# Altium PCB ebit_ad.PcbDoc (part 4 of 6)
Units mil, origin at the board's own origin, x right, y up, seen from the top; angles counter-clockwise.
Board outline 3958.82 x 3829.88 mil, 4 copper layers (Top Layer, MidLayer1, MidLayer2, Bottom Layer); 565 components, 392 nets, 1912 pads, 1242 vias.
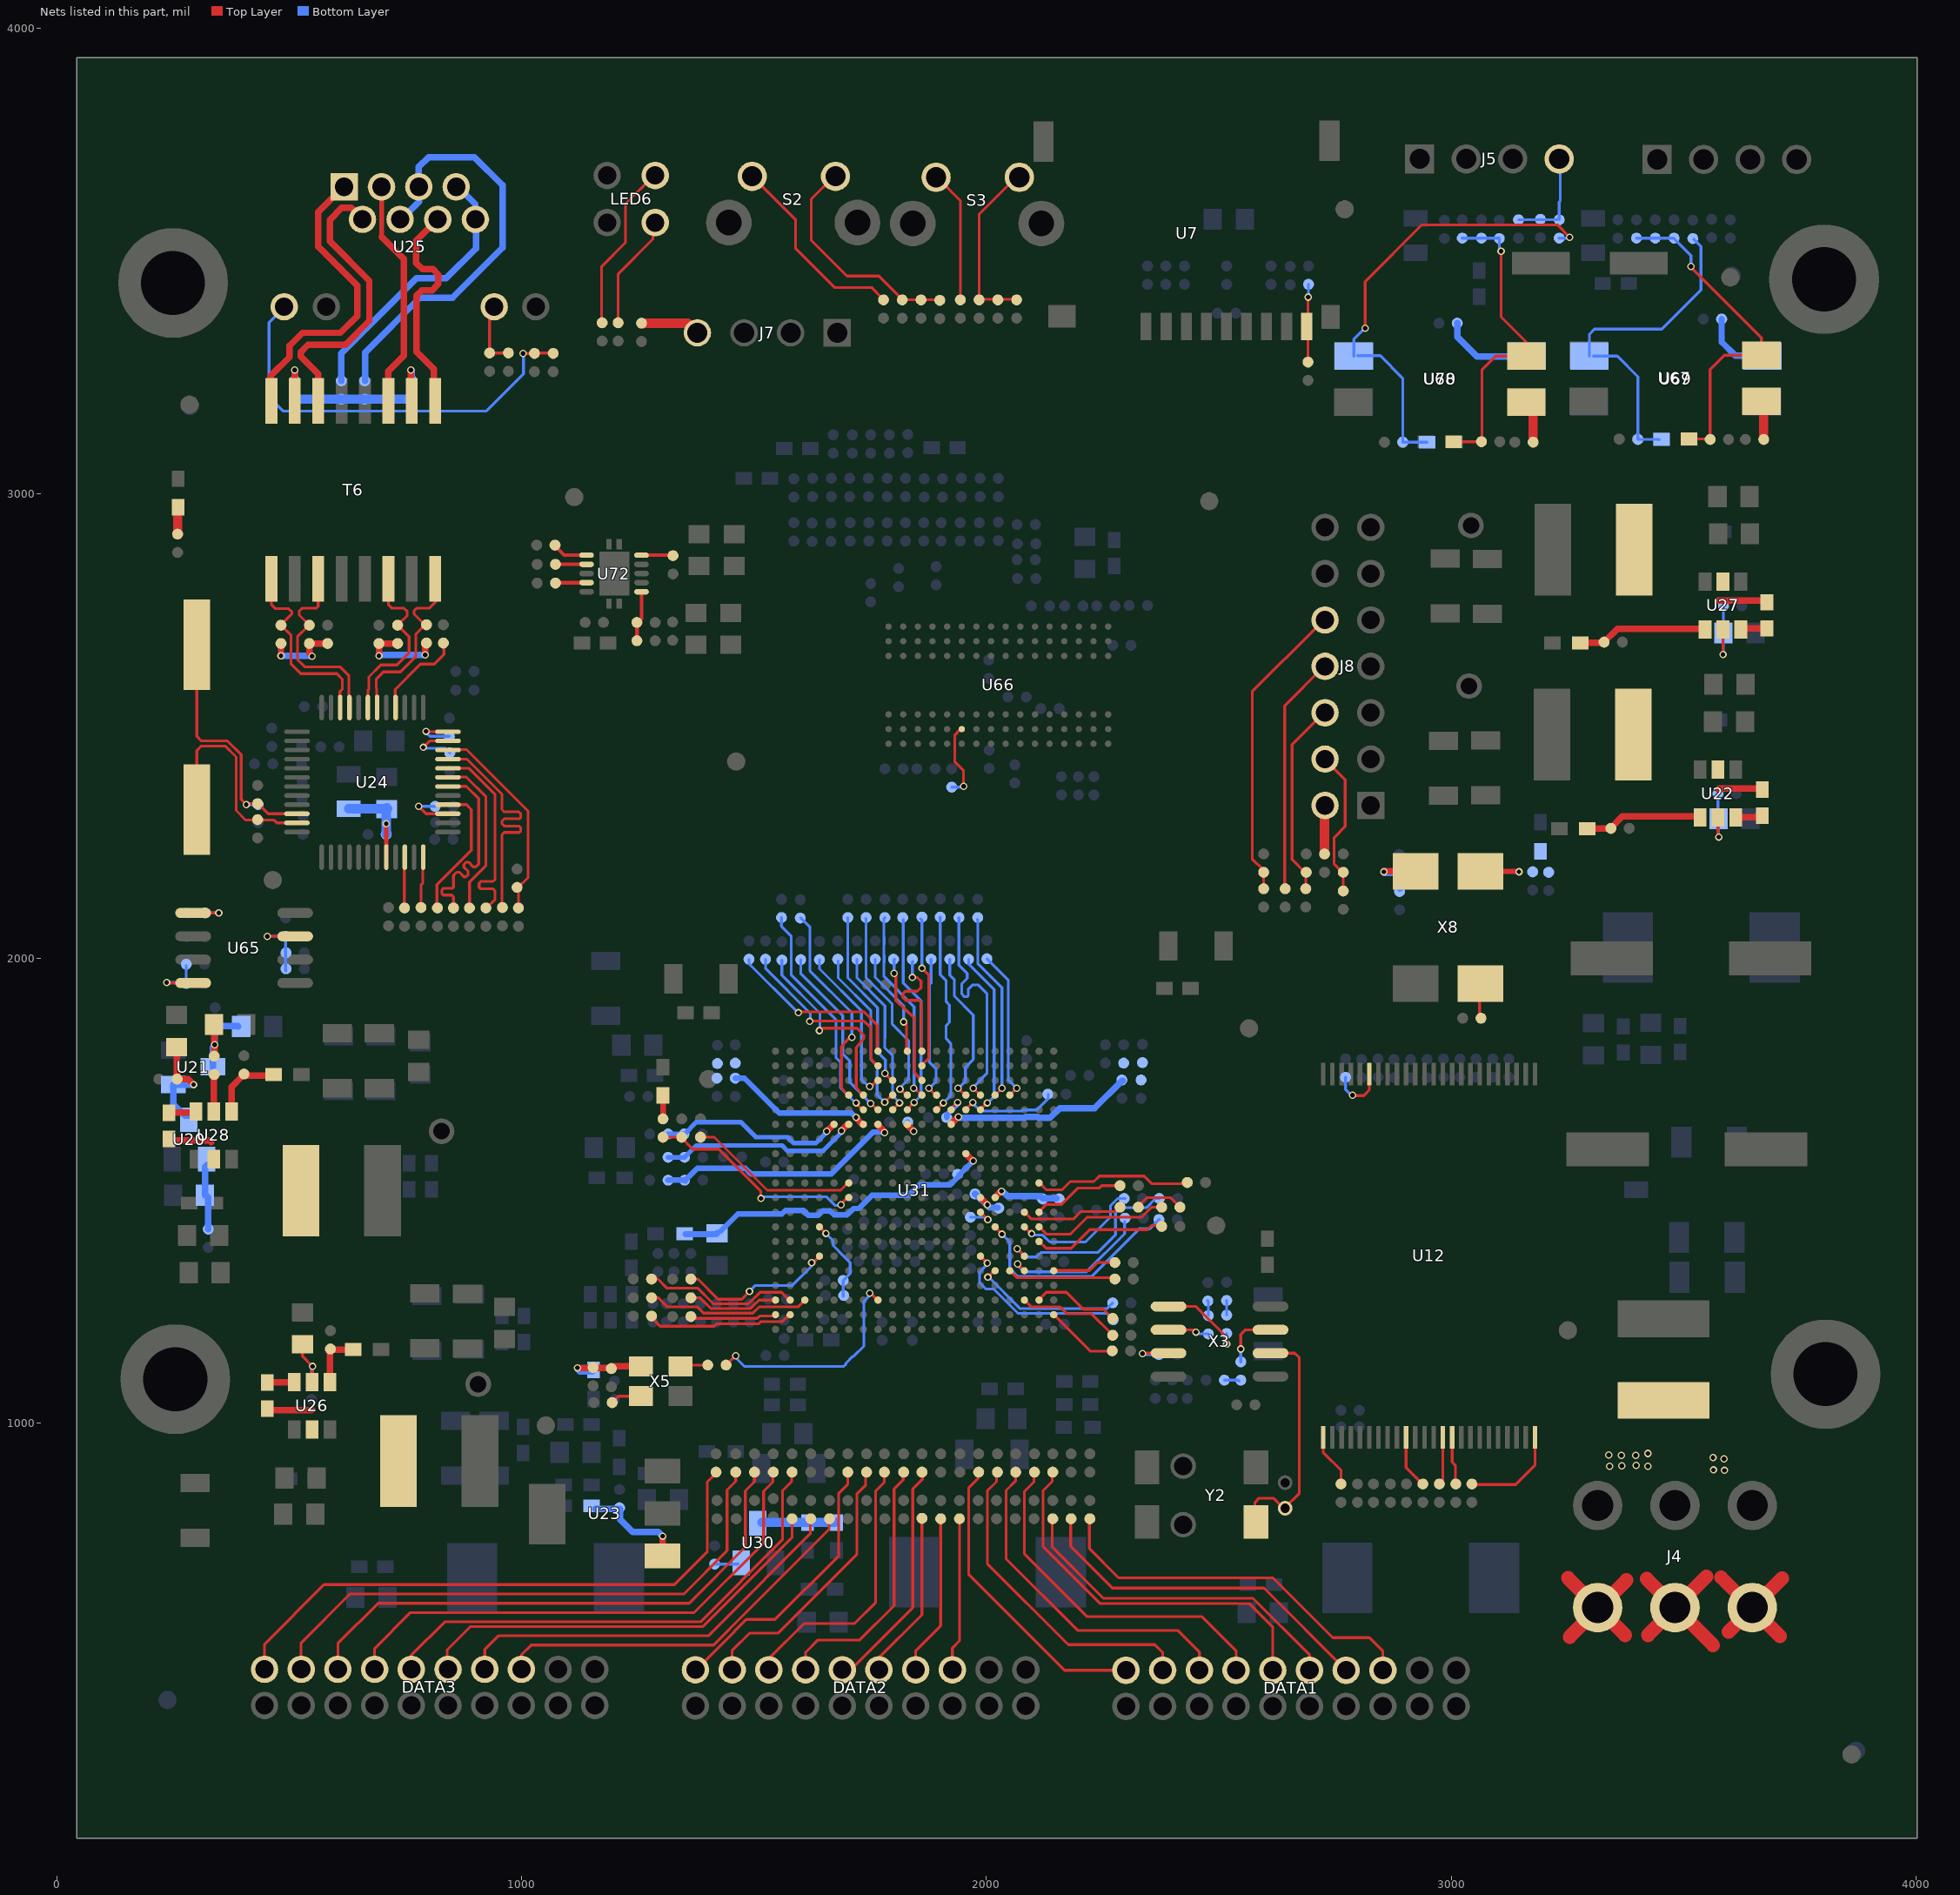
[diagram p6: the nets of this part, all layers, seen from the top]

## Via types
v1: diameter 16, hole 10, Top Layer to Bottom Layer, 1242 vias

## Nets (pads, with @x,y where several pads share a name; then routed paths per layer and width w, separated by ;. In a path a pad name is that pad's centre, name@x,y a point inside that pad or via, vN(x,y) a via of type N, cw(c..) or ccw(c..) an arc to the next point about the centre after c; other vN are vias at no path point) (continued)
NetJ5_4: C333.2 J5.4 R1363.2 R1364.2 | length 205.8
  Bottom Layer w6: C333.2@3144.69,3588.58 3226.38,3588.58 R1363.2@3227.36,3589.57 ; R1363.2@3232.28,3588.58 3232.28,3626.97 3234.25,3628.94 3234.25,3707.68 J5.4@3236.22,3709.65
NetJ7_4: J7.4 R1379.2 | length 126.1
  Top Layer w20: R1379.2@1260.83,3365.16 1261.81,3366.14 1357.28,3366.14 J7.4@1377.95,3345.47
NetL37_1: J4.1 J4.3 J4.5 L37.1 | length 1067.3
  Top Layer w30: 3251.14,667.15 3374.14,544.15 ; 3255.07,540.22 3377.09,662.23 ; 3420.38,665.18 3563.06,522.5 ; 3423.34,544.15 3549.29,670.1 ; 3580.78,668.14 3706.73,542.18 ; 3596.52,551.04 3711.65,666.17
  other v1: 3587.66,898.39 3564.05,899.38 3340.68,907.25 3423.34,907.25 3367.25,908.23 3397.75,909.22 3586.68,922.99 3563.06,925.94 3366.26,930.86 3396.77,930.86 3338.71,931.85 3423.34,934.8
NetLED1_1: LED1.1 R1501.2 | length 50.6
  Top Layer w12: R1501.2@1303.15,1654.53 1304.13,1655.51 LED1.1@1304.13,1704.72
NetLED4_1: LED4.1 R47.2 | length 55.1
  Top Layer w20: R47.2@259.84,2912.4 LED4.1@259.84,2967.52
NetLED6_1: LED6.1 R46.2 | length 238.7
  Top Layer w6: R46.2@1207.68,3367.13 1207.68,3472.44 1282.48,3547.24 LED6.1@1282.48,3574.8
NetLED6_2: LED6.2 R45.2 | length 369.7
  Top Layer w6: R45.2@1173.23,3364.17 1172.24,3365.16 1172.24,3488.19 1223.43,3539.37 1223.43,3623.03 1284.45,3684.05 LED6.2@1287.4,3684.05
NetR37_2: J8.6 R37.2 R1507.1 | length 411.3
  Top Layer w6: R37.2@2687.01,2149.61 2687.01,2183.07 2657.48,2212.6 2657.48,2459.65 2715.55,2517.72 J8.6@2722.44,2517.72
NetR117_1: R117.1 R2440.1 | length 32.3
  Bottom Layer w6: R2440.1@2511.81,1092.52 2541.34,1092.52 R117.1@2543.31,1090.55
NetR117_2: R117.2 X3.3 | length 128.1
  Top Layer w6: v1(2547.24,1159.45) 2547.24,1190.94 2557.09,1200.79 X3.3@2611.22,1200.79
  Bottom Layer w6: R117.2@2547.24,1131.89 v1@2547.24,1160.43
NetR120_2: R120.2 R2438.1 | length 33.3
  Bottom Layer w6: R2438.1@2475.39,1263.78 2477.36,1261.81 R120.2@2477.36,1231.3
NetR122_2: R122.2 R2439.1 | length 31.5
  Bottom Layer w6: R122.2@2516.73,1232.28 R2439.1@2516.73,1263.78
NetR1345_1: R1344.1 R1345.1 R1348.1 R2544.1 R2552.2 U67.2 | length 701.2
  Top Layer w6: R2552.2@3511.81,3117.13 R2544.1@3553.15,3117.13 ; v1(3515.75,3488.19) 3515.75,3486.22 3667.32,3334.65 U67.2@3667.32,3297.24 ; R2544.1@3557.09,3116.14 3557.09,3266.73 3587.6,3297.24 U67.2@3646.65,3297.24
  Bottom Layer w6: R1344.1@3398.62,3549.21 3478.35,3549.21 3515.75,3511.81 v1@3515.75,3491.14
NetR1346_1: R1346.1 R2350.2 R2554.2 U69.4 | length 738.1
  Bottom Layer w6: U69.4@3297.24,3295.28 3297.24,3342.52 3308.07,3353.35 3452.76,3353.35 3537.4,3437.99 3537.4,3531.5 R1346.1@3521.65,3547.24 ; U69.4@3306.1,3295.28 3357.28,3295.28 3401.57,3250.98 R2350.2@3401.58,3116.14 3446.85,3116.14 R2554.2@3447.83,3115.16
NetR1360_1: R1360.1 U12.19 | length 120.7
  Top Layer w6: v1(2787.4,1705.71) 2788.39,1704.72 2812.01,1704.72 2823.48,1716.19 U12.19@2823.48,1750.98
  Bottom Layer w6: R1360.1@2772.64,1744.09 2772.64,1717.52 v1@2785.43,1704.72
NetR1362_1: R1361.1 R1362.1 R1365.1 R2549.1 R2553.2 U68.2 | length 676.6
  Top Layer w6: R2553.2@3004.92,3111.22 R2549.1@3064.96,3111.22 ; R2549.1@3065.95,3112.2 3065.95,3265.75 3095.47,3295.28 U68.2@3161.42,3295.28 3161.42,3325.79 3107.28,3379.92 v1(3107.28,3520.67)
  Bottom Layer w6: R1362.1@3023.62,3549.21 3101.38,3549.21 R1365.1@3102.36,3550.2 ; R1365.1@3103.35,3548.23 3103.35,3522.64 v1@3105.32,3520.67
NetR1363_1: R1363.1 R2556.2 R2557.2 U70.4 | length 997.8
  Top Layer w6: v1(2814.96,3355.31) 2814.96,3455.71 2937.01,3577.76 3228.35,3577.76 v1(3254.92,3551.18)
  Bottom Layer w6: U70.4@2790.35,3295.28 2790.35,3331.69 2812.01,3353.35 v1@2813.98,3353.35 ; U70.4@2798.23,3296.26 2847.44,3296.26 2895.67,3248.03 R2556.2@2895.67,3110.24 ; R2556.2@2897.64,3111.22 2898.62,3110.24 R2557.2@2947.83,3110.24 ; R1363.1@3232.28,3549.21 3251.97,3549.21 v1@3252.95,3550.2
NetR1372_1: R1372.1 X5.3 | length 47.2
  Top Layer w6: X5.3@1353.35,1125 R1372.1@1400.59,1125
NetR1372_2: R1372.2 U31.N18 | length 470.7
  Top Layer w6: R1372.2@1439.96,1125 1459.65,1144.68 v1(1460.63,1144.68) ; v1@1750.98,1279.53 U31.N18@1764.87,1265.65
  Bottom Layer w6: v1(1460.63,1144.68) 1460.63,1140.75 1479.33,1122.05 1692.91,1122.05 1697.43,1126.57 1697.43,1128.49 1712.66,1143.72 1714.59,1143.72 1736.22,1165.35 1736.22,1261.81 v1@1750,1275.59
  other v1: 1749.02,1279.53
NetR1373_2: C625.1 R1373.2 U20.1 | length 144.2
  Bottom Layer w14: C625.1@318.9,1490.16 318.9,1551.18 U20.1@322.83,1555.12 ; C625.1@318.9,1492.13 325.79,1485.24 R1373.2@325.79,1417.32
NetR1384_2: R1384.2 T6.10 | length 91.3
  Top Layer w14: v1(761.81,3265.75) 761.81,3200.65 T6.10@763.64,3198.82
  Bottom Layer w14: R1384.2@763.78,3242.13 v1@763.78,3265.75
NetR1385_2: R1385.2 R2560.1 U24.22 | length 430.1
  Top Layer w6: U24.22@854.33,2448.82 881.89,2448.82 1013.78,2316.93 1013.78,2173.23 993.11,2152.56 993.11,2112.2 R1385.2@995.08,2110.24
NetR1388_1: C366.1 R1388.1 R1411.1 | length 157.8
  Top Layer w14: v1(482.28,2650.59) R1388.1@482.28,2677.17 ; R1411.1@543.31,2677.17 543.31,2655.51 v1(549.21,2649.61) ; R1411.1@545.28,2678.15 546.26,2677.17 C366.1@582.68,2677.17
  Bottom Layer w14: v1(482.28,2650.59) 544.29,2650.59 v1@545.28,2649.61
NetR1393_1: R1393.1 U24.28 | length 198.5
  Top Layer w6: U24.28@727.81,2539.37 727.81,2578.2 782.48,2632.87 812.01,2632.87 832.68,2653.54 R1393.1@832.68,2677.17
NetR1400_2: R1400.2 T6.15 | length 88.4
  Top Layer w14: T6.15@511.95,3198.82 v1@511.95,3264.62
  Bottom Layer w14: R1400.2@511.81,3242.13 v1@511.81,3264.76
  other v1: 511.81,3265.75
NetR1404_1: R1384.1 R1400.1 R1404.1 R1407.1 | length 251
  Bottom Layer w20: R1400.1@511.81,3202.76 R1384.1@762.8,3202.76
NetR1406_1: C372.1 R1406.1 R1409.1 | length 194.1
  Top Layer w14: C372.1@690.95,2679.13 C372.1@692.91,2677.17 ; v1(692.91,2650.59) C372.1@692.91,2677.17 ; R1406.1@733.27,2677.17 C372.1@692.91,2677.17 ; v1(792.32,2652.56) R1409.1@792.32,2678.15
  Bottom Layer w14: v1@693.9,2651.57 694.88,2652.56 v1(792.32,2652.56)
NetR1413_2: C386.1 R1413.2 U26.5 | length 111.6
  Top Layer w6: C386.1@528.54,1169.29 528.54,1143.7 v1(550.2,1122.05) 550.2,1099.41 U26.5@551.18,1098.42
  Bottom Layer w6: R1413.2@548.23,1090.55 548.23,1119.09 v1@550.2,1121.06
NetR1493_1: R1493.1 R2512.2 U31.F11 | length 83.2
  Top Layer w14: U31.F11@1986.43,1485.75 2001.97,1470.21 v1(2001.97,1469.49)
  Bottom Layer w14: R1493.1@1975.39,1493.11 1976.38,1493.11 2005.91,1463.58 R2512.2@2023.62,1463.58
NetR1500_1: R1500.1 R1501.1 U31.R11 | length 474.1
  Top Layer w6: R1501.1@1304.13,1615.16 1342.52,1615.16 1368.11,1589.57 1424.21,1589.57 1514.76,1499.02 v1@1514.76,1485.24 ; v1@1687.99,1470.47 1687.99,1472.18 U31.R11@1701.57,1485.75
  Bottom Layer w6: v1(1514.76,1483.27) 1518.7,1487.2 1655.51,1487.2 1674.21,1468.5 v1@1686.02,1468.5
  other v1: 1687.01,1469.49
NetR1502_1: R1502.1 U31.L6 | length 47.9
  Top Layer w14: U31.L6@1828.17,1642.98 1843.19,1627.95 v1(1843.5,1627.95)
  Bottom Layer w12: R1502.1@1830.71,1647.64 1830.71,1640.75 v1@1844.49,1626.97
NetR1503_1: R1503.1 U31.R10 | length 368
  Top Layer w6: R1503.1@1384.84,1615.16 1414.37,1615.16 1528.54,1500.98 1686.02,1500.98 U31.R10@1699.8,1514.76
NetR1504_2: J8.4 R38.1 R1504.2 | length 305.8
  Top Layer w6: J8.4@2737.2,2418.31 2771.65,2383.86 2771.65,2283.46 2748.03,2259.84 2748.03,2202.76 2767.72,2183.07 R1504.2@2767.72,2144.68
NetR1505_2: J8.8 R1505.2 | length 511.4
  Top Layer w6: R1505.2@2642.72,2151.57 2641.73,2152.56 2641.73,2543.31 2725.39,2626.97 J8.8@2726.38,2626.97
NetR1506_2: J8.10 R36.1 R1506.2 | length 638.4
  Top Layer w6: R1506.2@2596.46,2149.61 2596.46,2188.98 2571.85,2213.58 2571.85,2573.82 2712.6,2714.57 J8.10@2717.52,2714.57
NetR1949_2: R1948.2 R1949.2 U65.4 | length 138.6
  Top Layer w6: v1(236.22,1947.83) 237.2,1946.85 U65.4@293.31,1946.85
  Bottom Layer w6: v1(236.22,1947.83) 277.56,1947.83 R1948.2@278.54,1946.85 ; R1948.2@278.54,1945.87 R1949.2@278.54,1984.25
NetR2336_1: R2336.1 U65.1 | length 82.1
  Top Layer w6: U65.1@293.31,2097.44 v1(348.43,2097.44)
  Bottom Layer w6: R2336.1@318.9,2097.44 344.49,2097.44 v1@345.47,2098.42
NetR2340_2: R2340.2 X8.3 | length 75
  Top Layer w6: R2340.2@3062.01,1872.05 3061.02,1873.03 3061.02,1943.9 X8.3@3062.99,1945.87
NetR2389_1: R2389.1 R2391.2 X8.1 | length 134.9
  Top Layer w14: v1(2855.32,2186.02) 2856.3,2187.01 X8.1@2923.23,2187.01
  Bottom Layer w14: v1(2855.32,2186.02) 2857.28,2184.05 R2389.1@2885.83,2184.05 ; R2389.1@2887.8,2184.05 2887.8,2151.57 R2391.2@2889.76,2149.61
NetR2430_1: R2430.1 U31.B10 | length 347
  Top Layer w6: U31.B10@2113.03,1517.2 2113.71,1517.2 2128.94,1501.97 2162.4,1501.97 2180.12,1519.68 2231.3,1519.68 2243.11,1531.5 2339.57,1531.5 2356.3,1514.76 2426.18,1514.76 R2430.1@2432.09,1520.67
NetR2433_1: R2432.1 R2433.1 U31.E11 | length 139.5
  Top Layer w14: U31.E11@2018.08,1485.75 2029.86,1497.54 v1@2030.02,1497.54
  Bottom Layer w14: v1@2034.45,1499.02 2045.28,1488.19 2116.14,1488.19 2121.06,1483.27 R2432.1@2150.59,1483.27
  other v1: 2032.48,1499.02
NetR2455_1: R2455.1 U66.L8 | length 161.3
  Top Layer w6: U66.L8@1946.85,2492.13 1943.9,2492.13 1932.09,2480.31 1932.09,2422.24 1950.79,2403.54 v1(1950.79,2370.08)
  Bottom Layer w6: R2455.1@1925.2,2368.11 v1@1948.82,2368.11
NetR2461_2: R2461.2 U31.U15 | length 332.6
  Top Layer w6: R2461.2@1364.17,1310.04 1378.94,1310.04 1422.24,1266.73 1473.43,1266.73 v1(1490.16,1283.46) ; v1@1625,1343.5 1638.26,1356.77 U31.U15@1638.26,1359.98
  Bottom Layer w6: v1(1490.16,1283.46) 1502.95,1296.26 1582.68,1296.26 1623.03,1336.61 v1@1623.03,1341.54
  other v1: 1624.02,1345.47
NetR2462_2: R2462.2 U31.W19 | length 314.4
  Top Layer w6: R2462.2@1279.53,1230.31 1279.53,1227.36 1298.23,1208.66 1414.37,1208.66 1419.29,1213.58 1509.84,1213.58 1514.76,1218.5 1561.02,1218.5 U31.W19@1573.82,1231.3
NetR2463_2: R2463.2 U31.W18 | length 331.4
  Top Layer w6: R2463.2@1279.53,1310.04 1293.31,1310.04 1312.99,1290.35 1378.94,1290.35 1412.56,1256.73 1488.03,1256.73 1512.8,1281.5 1559.06,1281.5 U31.W18@1572.83,1267.72
NetR2464_2: R2464.2 U31.Y18 | length 198.1
  Top Layer w6: R2464.2@1364.17,1269.68 1383.86,1269.68 1406.81,1246.73 1492.8,1246.73 1510.83,1264.76 U31.Y18@1545.28,1264.76
NetR2466_2: R2466.2 U31.Y19 | length 184
  Top Layer w6: R2466.2@1364.17,1229.33 1368.11,1225.39 1506.89,1225.39 1511.81,1230.31 1540.35,1230.31 U31.Y19@1543.31,1233.27
NetR2468_1: R2468.1 R2487.2 U23.1 | length 224.7
  Top Layer w14: U23.1@1303.15,714.57 v1(1303.15,756.89)
  Bottom Layer w14: R2468.1@1158.46,815.94 1211.61,815.94 1211.61,793.31 1239.17,765.75 1294.29,765.75 v1(1303.15,756.89)
NetR2472_1: DATA1.19 R2472.1 | length 651.3
  Top Layer w6: R2472.1@1982.28,893.7 1982.28,880.91 1961.61,860.24 1961.61,675.2 2168.31,468.5 DATA1.19@2300.2,468.5
NetR2473_1: DATA1.17 R2473.1 | length 692.7
  Top Layer w6: R2473.1@2021.65,887.8 2021.65,874.02 2001.97,854.33 2001.97,697.83 2176.18,523.62 2362.2,523.62 2379.16,506.67 DATA1.17@2379.16,468.5
NetR2473A_1: DATA1.13 R2473A.1 | length 767.1
  Top Layer w6: R2473A.1@2102.36,893.7 2102.36,874.02 2081.69,853.35 2081.69,718.5 2216.54,583.66 2463.58,583.66 2537.07,510.17 DATA1.13@2537.07,468.5
NetR2474_1: DATA1.15 R2474.1 | length 733.2
  Top Layer w6: R2474.1@2062.99,894.68 2062.99,875.98 2042.32,855.31 2042.32,707.68 2195.87,554.13 2411.42,554.13 2458.12,507.44 DATA1.15@2458.12,468.5
NetR2476_1: DATA1.11 R2476.1 | length 823
  Top Layer w6: R2476.1@2141.73,890.75 2141.73,875 2122.05,855.31 2122.05,734.25 2244.09,612.2 2564.96,612.2 2616.03,561.13 DATA1.11@2616.03,468.5
NetR2477_1: DATA1.9 R2477.1 | length 740.5
  Top Layer w6: R2477.1@2141.73,791.34 2141.73,733.27 2251.8,623.2 2573.65,623.2 2694.99,501.86 DATA1.9@2694.99,468.5
NetR2478_1: DATA1.7 R2478.1 | length 759.4
  Top Layer w6: R2478.1@2181.1,791.34 2181.1,735.24 2271.13,645.2 2597.25,645.2 DATA1.7@2773.95,468.5
NetR2479_1: DATA1.5 R2479.1 | length 826.2
  Top Layer w6: R2479.1@2222.44,792.32 2221.46,791.34 2221.46,730.31 2284.57,667.2 2616.26,667.2 2745.08,538.39 2823.82,538.39 2852.91,509.3 DATA1.5@2852.91,468.5
NetR2484_1: DATA2.5 R2484.1 | length 328.6
  Top Layer w6: DATA2.5@1926.73,469.49 1926.73,516.29 1941.93,531.5 1941.93,790.35 R2484.1@1942.91,791.34
NetR2485_1: DATA2.7 R2485.1 | length 349.1
  Top Layer w6: DATA2.7@1847.77,469.49 1847.77,510.17 1901.58,563.98 R2485.1@1901.58,796.26
NetR2486_1: DATA2.9 R2486.1 | length 360.5
  Top Layer w6: DATA2.9@1768.81,469.49 1768.81,495.19 1861.22,587.6 1861.22,790.35 R2486.1@1862.2,791.34
NetR2487A_1: DATA2.11 R2487A.1 | length 504.1
  Top Layer w6: DATA2.11@1689.85,469.49 1707.68,469.49 1841.54,603.35 1841.54,858.27 1862.2,878.94 R2487A.1@1862.2,891.73
NetR2488_1: DATA2.13 R2488.1 | length 561.7
  Top Layer w6: DATA2.13@1610.89,469.49 1610.89,506.56 1637.8,533.46 1727.36,533.46 1801.18,607.28 1801.18,858.27 1820.87,877.95 R2488.1@1820.87,891.73
NetR2489_1: DATA2.15 R2489.1 | length 588.2
  Top Layer w6: DATA2.15@1531.93,469.49 1531.93,493.55 1607.28,568.9 1716.54,568.9 1761.81,614.17 1761.81,854.33 1780.51,873.03 R2489.1@1780.51,890.75
NetR2490_1: DATA2.17 R2490.1 | length 580.9
  Top Layer w6: DATA2.17@1452.98,469.49 1452.98,511.05 1490.16,548.23 1551.18,548.23 1721.46,718.5 1721.46,848.42 1740.16,867.13 R2490.1@1740.16,895.67
NetR2491_1: DATA2.19 R2491.1 | length 593.2
  Top Layer w6: DATA2.19@1374.02,469.49 1375.63,469.49 1457.91,551.77 1457.91,552.18 1483.49,577.76 1545.28,577.76 1682.09,714.57 1682.09,849.41 1701.77,869.09 R2491.1@1701.77,889.76
NetR2496_1: DATA3.5 R2496.1 | length 828.9
  Top Layer w6: DATA3.5@999.56,470.47 999.56,501.53 1020.59,522.56 1413.14,522.56 1446.91,556.32 1446.91,556.73 1661.42,771.24 R2496.1@1661.42,795.28
NetR2497_1: DATA3.7 R2497.1 | length 874.8
  Top Layer w6: DATA3.7@920.6,470.47 920.6,513.12 950.04,542.56 1402.03,542.56 1424.91,565.44 1424.91,565.84 1621.06,762 R2497.1@1621.06,790.35
NetR2498_1: DATA3.9 R2498.1 | length 925.6
  Top Layer w6: DATA3.9@841.65,470.47 839.57,472.55 839.57,511.81 890.32,562.56 1390.32,562.56 1402.91,575.15 ; 1402.91,574.55 1402.91,575.15 ; R2498.1@1581.69,794.29 1581.69,753.94 1402.91,575.15
NetR2499_1: DATA3.11 R2499.1 | length 1080.4
  Top Layer w6: DATA3.11@762.69,470.47 762.69,500.88 834.37,572.56 1384.57,572.56 1561.02,749.02 1561.02,854.33 1580.71,874.02 R2499.1@1580.71,889.76
NetR2500_1: DATA3.13 R2500.1 | length 1131.7
  Top Layer w6: DATA3.13@683.73,470.47 683.73,515.42 760.87,592.56 1371.32,592.56 1520.67,741.91 1520.67,853.35 1540.35,873.03 R2500.1@1540.35,889.76
NetR2501_1: DATA3.15 R2501.1 | length 1185.3
  Top Layer w6: DATA3.15@604.77,470.47 604.77,526.03 691.3,612.56 1360.21,612.56 1481.3,733.65 1481.3,854.33 1500.98,874.02 R2501.1@1500.98,892.72
NetR2502_1: DATA3.17 R2502.1 | length 1208.8
  Top Layer w6: DATA3.17@525.59,494.09 525.59,527.56 630.59,632.56 1349.09,632.56 1441.93,725.39 1441.93,856.3 1460.63,875 R2502.1@1460.63,894.68
NetR2503_1: DATA3.19 R2503.1 | length 1263.5
  Top Layer w6: DATA3.19@446.85,470.47 446.85,524.61 574.8,652.56 1328.74,652.56 1399.61,723.42 1399.61,874.02 R2503.1@1416.34,890.75
NetR2540_1: R2540.1 R2541.1 U31.U13 | length 187.2
  Top Layer w6: U31.U13@1638.26,1422.87 1640.13,1422.87 v1@1656.5,1406.5
  Bottom Layer w6: v1@1656.5,1406.5 v1@1657.48,1405.51 ; v1@1657.48,1407.48 v1@1657.48,1405.51 ; R2541.1@1691.93,1272.64 1691.93,1305.12 R2540.1@1692.91,1306.1 ; R2540.1@1691.93,1307.09 1706.69,1321.85 1706.69,1345.47 1693.02,1359.14 1669.78,1382.35 1669.78,1393.21 v1@1657.48,1405.51
  other v1: 1654.78,1408.21
NetR2543_2: R2445.2 R2543.2 | length 107.8
  Top Layer w6: R2445.2@2326.77,1464.57 2326.77,1466.53 2345.47,1485.24 2395.67,1485.24 R2543.2@2416.34,1464.57
NetR2545_2: R2545.2 U67.1 | length 72.3
  Top Layer w20: R2545.2@3672.24,3116.14 3672.24,3180.12 U67.1@3678.15,3186.02
NetR2547_2: R2547.2 U68.1 | length 66.4
  Top Layer w20: U68.1@3175.2,3176.18 3176.18,3175.2 R2547.2@3176.18,3110.24
NetR2602_2: J8.2 R2602.2 | length 106.7
  Top Layer w20: R2602.2@2727.36,2222.44 2727.36,2327.76 J8.2@2728.35,2328.74
NetR2605_1: R2605.1 U28.5 | length 80.7
  Top Layer w14: U28.5@337.6,1670.28 R2605.1@337.6,1750.98
NetR2615_1: R2615.1 R2616.1 U72.1 | length 109.4
  Top Layer w8: R2616.1@1248.03,2683.07 1248.03,2720.47 1257.87,2730.31 U72.1@1257.87,2788.39
NetR2618_2: R2618.2 U72.5 | length 68.9
  Top Layer w8: U72.5@1256.89,2867.13 R2618.2@1325.79,2867.13
NetR2800_2: C402.1 C626.1 R2605.2 R2800.2 U21.3 | length 210.4
  Top Layer w14: R2605.2@337.6,1787.4 339.57,1789.37 v1(339.57,1813.98) 338.58,1814.96 C402.1@338.58,1857.28
  Bottom Layer w14: U21.3@335.63,1766.73 335.63,1808.07 v1@339.57,1812.01 ; R2800.2@338.58,1856.3 339.57,1855.31 v1(339.57,1813.98) ; R2800.2@340.55,1854.33 388.78,1854.33 C626.1@389.76,1853.35
NetS2_3: C73.2 R120A.2 R2646.2 S2.3 | length 492.4
  Top Layer w6: S2.3@1675.2,3682.09 1672.24,3682.09 1623.03,3632.87 1623.03,3544.29 1699.8,3467.52 1768.7,3467.52 R2646.2@1816.93,3419.29 ; R2646.2@1816.93,3416.34 C73.2@1902.56,3416.34
NetS2_4: R2647.2 S2.4 | length 425.7
  Top Layer w6: S2.4@1496.06,3682.09 1589.57,3588.58 1589.57,3526.57 1673.23,3442.91 1752.95,3442.91 R2647.2@1776.58,3419.29
NetS3_3: C2410.2 R2648.2 R2650.2 S3.3 | length 364.4
  Top Layer w6: R2650.2@1983.27,3418.31 1984.25,3417.32 2062.99,3417.32 R2648.2@2063.98,3416.34 ; R2650.2@1984.25,3416.34 1984.25,3600.39 S3.3@2054.13,3670.28
NetS3_4: R2641A.2 S3.4 | length 282.4
  Top Layer w6: S3.4@1891.73,3680.12 1893.7,3680.12 1943.9,3629.92 1943.9,3423.23 R2641A.2@1941.93,3421.26
NetT6_1: R1388.2 T6.1 U24.34 | length 409.7
  Top Layer w6: T6.1@461.61,2815.94 461.61,2760.83 470.47,2751.97 499.02,2751.97 505.91,2745.08 505.91,2741.14 R1388.2@480.32,2715.55 ; R1388.2@482.28,2716.54 503.94,2694.88 503.94,2632.87 524.61,2612.2 602.36,2612.2 614.17,2600.39 614.17,2578.74 609.25,2573.82 U24.34@609.25,2555.12
NetT6_3: R1411.2 T6.3 U24.33 | length 415.2
  Top Layer w6: R1411.2@540.35,2714.57 517.72,2691.93 517.72,2642.72 533.46,2626.97 609.25,2626.97 628.49,2607.73 U24.33@628.49,2539.37 ; R1411.2@541.34,2718.5 521.65,2738.19 521.65,2747.05 527.56,2752.95 558.07,2752.95 562.29,2757.17 T6.3@562.29,2815.94
NetT6_6: R1406.2 T6.6 U24.31 | length 365.7
  Top Layer w6: U24.31@669.29,2552.17 669.29,2576.77 671.26,2578.74 671.26,2605.31 696.85,2630.91 731.3,2630.91 757.87,2657.48 757.87,2691.93 R1406.2@733.27,2716.54 ; T6.6@713.3,2815.94 713.3,2761.11 721.46,2752.95 747.05,2752.95 753.94,2746.06 753.94,2737.2 R1406.2@737.2,2720.47
NetT6_8: R1409.2 T6.8 U24.30 | length 383.5
  Top Layer w6: U24.30@688.08,2539.37 688.08,2580.62 687.01,2581.69 687.01,2600.39 702.76,2616.14 739.17,2616.14 772.64,2649.61 772.64,2697.83 R1409.2@792.32,2717.52 ; R1409.2@789.37,2719.49 768.7,2740.16 768.7,2748.03 773.62,2752.95 801.18,2752.95 813.98,2765.75 T6.8@813.98,2815.94
NetU7_9: R166.1 R167.2 U7.9 | length 168.4
  Top Layer w6: U7.9@2688.98,3359.25 2691.93,3362.2 v1(2691.93,3422.24) ; U7.9@2690.95,3359.25 2691.93,3358.27 R167.2@2691.93,3282.48
  Bottom Layer w6: R166.1@2692.91,3449.8 2692.91,3424.21 v1@2693.9,3423.23
NetU12_25: R248.2 U12.25 | length 114.3
  Top Layer w6: U12.25@2724.41,969.49 2724.41,937.01 2762.8,898.62 R248.2@2762.8,871.06
NetU12_34: R247.2 U12.34 | length 117.4
  Top Layer w6: U12.34@2902.73,969.49 2902.73,904.36 2938.98,868.11 R247.2@2939.96,868.11
NetU12_38: R246.2 U12.38 | length 101.3
  Top Layer w6: R246.2@2977.36,870.08 2981.98,874.7 U12.38@2981.98,969.49
NetU12_39: R245.2 U12.39 | length 105.3
  Top Layer w6: U12.39@3001.8,969.49 3001.8,916.51 3008.86,909.45 R245.2@3008.86,867.13
NetU12_48: R244.2 U12.48 | length 213
  Top Layer w6: R244.2@3044.29,868.11 3138.78,868.11 3180.12,909.45 U12.48@3180.12,969.49
NetU20_3: C628.1 R2599.2 U20.3 U21.1 | length 240.9
  Top Layer w14: C628.1@257.87,1809.05 257.87,1741.14 R2599.2@258.86,1740.16 282.48,1740.16 v1(294.29,1728.35)
  Bottom Layer w14: U20.3@286.42,1661.42 275.59,1661.42 250.98,1686.02 U21.1@250.98,1728.35 v1(294.29,1728.35)
NetU22_2: C295.2 L7.2 U22.2 | length 97.1
  Top Layer w14: 3573.82,2363.19 3575.79,2365.16 3667.32,2365.16 C295.2@3669.29,2363.19
NetU22_4: R1333.2 R1336.1 U22.4 | length 253.5
  Top Layer w14: R1333.2@3292.32,2278.54 3293.31,2279.53 3342.52,2279.53 3368.11,2305.12 3533.46,2305.12 U22.4@3534.45,2304.13
NetU22_5: C294.2 R2603.1 U22.5 | length 128.6
  Top Layer w6: U22.5@3573.82,2303.15 3573.82,2262.79 v1(3575.79,2260.83)
  Bottom Layer w6: R2603.1@3573.82,2354.33 3573.82,2313.98 C294.2@3575.79,2312.01 ; v1@3574.8,2257.87 C294.2@3574.8,2300.2
NetU22_6: C295.1 U22.6 | length 53.2
  Top Layer w14: U22.6@3610.24,2303.15 3655.51,2303.15 C295.1@3659.45,2307.09 ; C295.1@3668.31,2309.05 3668.31,2308.07 C295.1@3669.29,2307.09
NetU24_10: R1392.2 U24.10 | length 109.4
  Top Layer w6: U24.10@747.67,2217.52 747.67,2108.63 R1392.2@748.03,2108.27
NetU24_12: R1386.2 U24.12 | length 109.3
  Top Layer w6: R1386.2@784.45,2110.24 783.46,2111.22 783.46,2157.48 787.4,2161.42 U24.12@787.4,2217.52
NetU24_15: R1381.2 U24.15 | length 104
  Top Layer w6: v1(778.54,2326.77) 794.47,2310.84 U24.15@840.55,2310.84
  Bottom Layer w6: v1(778.54,2326.77) R1381.2@813.98,2326.77
NetU24_16: R1410.2 U24.16 | length 296.8
  Top Layer w6: R1410.2@817.91,2109.25 817.91,2158.46 891.73,2232.28 891.73,2319.88 881.17,2330.44 U24.16@840.55,2330.44
NetU24_18: R1405.2 U24.18 | length 422.9
  Top Layer w6: R1405.2@853.35,2108.27 853.35,2131.89 849.41,2135.83 831.69,2135.83 828.74,2138.78 828.74,2147.64 831.69,2150.59 851.38,2150.59 853.35,2152.56 853.35,2178.15 860.24,2185.04 866.14,2185.04 875.98,2175.2 879.92,2175.2 884.84,2180.12 884.84,2187.01 875.98,2195.87 875.98,2201.77 880.91,2206.69 885.83,2206.69 895.67,2196.85 901.57,2196.85 907.48,2202.76 907.48,2343.5 880.91,2370.08 U24.18@854.33,2370.08
NetU24_19: R1397.2 U24.19 | length 343.2
  Top Layer w6: U24.19@851.38,2389.76 880.91,2389.76 923.23,2347.44 923.23,2199.8 887.8,2164.37 R1397.2@887.8,2108.27
NetU24_20: R1394.2 U24.20 | length 435.9
  Top Layer w6: U24.20@840.55,2408.82 886.45,2408.82 942.91,2352.36 942.91,2169.29 938.98,2165.35 912.4,2165.35 908.46,2161.42 908.46,2152.56 911.42,2149.61 937.99,2149.61 942.91,2144.68 942.91,2126.97 R1394.2@925.2,2109.25
NetU24_21: R1391.2 U24.21 | length 535.1
  Top Layer w6: U24.21@840.55,2428.42 882.61,2428.42 957.68,2353.35 957.68,2319.88 962.6,2314.96 994.09,2314.96 998.03,2311.02 998.03,2302.17 996.06,2300.2 962.6,2300.2 957.68,2295.28 957.68,2289.37 962.6,2284.45 994.09,2284.45 998.03,2280.51 998.03,2273.62 995.08,2270.67 962.6,2270.67 957.68,2265.75 957.68,2110.24 R1391.2@958.66,2109.25
NetU24_23: R1408.2 U24.23 | length 117.1
  Top Layer w6: v1(788.39,2453.74) 802.25,2467.61 U24.23@840.55,2467.61
  Bottom Layer w6: v1@790.35,2451.77 835.63,2451.77 R1408.2@845.47,2441.93
NetU24_24: R1396.1 U24.24 | length 101.9
  Top Layer w6: v1(794.29,2488.19) 795.28,2487.2 U24.24@840.55,2487.2
  Bottom Layer w6: v1@793.31,2487.2 803.15,2477.36 R1396.1@844.49,2477.36
NetU24_46: C380.1 R1485.2 U24.46 Y3.2 | length 513.4
  Top Layer w6: Y3.2@293.31,2626.97 301.18,2619.09 301.18,2477.36 311.02,2467.52 367.13,2467.52 396.65,2437.99 396.65,2341.54 v1(407.48,2330.71) 409.45,2332.68 C380.1@432.09,2332.68 ; C380.1@435.04,2330.71 454.9,2310.84 U24.46@515.75,2310.84
  Bottom Layer w6: v1@410.43,2330.71 R1485.2@433.07,2330.71
NetU24_47: C377.2 U24.47 Y3.1 | length 471.7
  Top Layer w6: Y3.1@301.18,2319.88 301.18,2446.85 311.02,2456.69 362.2,2456.69 385.83,2433.07 385.83,2317.91 406.5,2297.24 467.52,2297.24 473.43,2291.34 U24.47@505.91,2291.34
NetU25_1: T6.16 U25.1 | length 630.2
  Top Layer w14: T6.16@460.63,3214.57 460.63,3252.95 500.98,3293.31 500.98,3317.91 528.54,3345.47 610.24,3345.47 646.65,3381.89 646.65,3446.85 562.01,3531.5 562.01,3605.31 ; 564.96,3608.27 U25.1@619.09,3662.4 ; U25.1@616.14,3659.45 U25.1@619.09,3659.45
NetU25_2: T6.14 U25.2 | length 626.6
  Top Layer w14: T6.14@562.01,3212.6 562.01,3256.89 524.61,3294.29 524.61,3304.13 540.35,3319.88 621.06,3319.88 672.24,3371.06 672.24,3457.68 587.6,3542.32 587.6,3588.58 613.19,3614.17 633.86,3614.17 U25.2@658.46,3589.57
NetU25_3: T6.11 U25.3 | length 479.5
  Top Layer w10: 698.82,3552.17 698.82,3638.78 U25.3@702.76,3642.72
  Top Layer w14: 698.82,3552.17 747.05,3503.94 747.05,3296.26 713.3,3262.51 T6.11@713.3,3198.82
NetU25_4: R1404.2 U25.4 U25.5 | length 916.3
  Bottom Layer w14: R1404.2@663.39,3242.13 663.39,3303.15 781.5,3421.26 851.38,3421.26 958.66,3528.54 958.66,3663.39 898.62,3723.42 800.2,3723.42 778.87,3702.1 U25.5@778.87,3659.45 ; U25.4@738.52,3589.57 741.14,3589.57 779.53,3627.95 U25.5@779.53,3646.65
NetU25_6: T6.9 U25.6 | length 487.9
  Top Layer w14: T6.9@813.98,3198.82 811.02,3201.77 811.02,3267.72 773.62,3305.12 773.62,3425.2 785.43,3437.01 807.09,3437.01 820.87,3450.79 820.87,3470.47 809.06,3482.28 786.42,3482.28 772.64,3496.06 772.64,3543.31 U25.6@815.95,3586.61
NetU25_7: R1407.2 U25.7 U25.8 | length 565.8
  Bottom Layer w14: R1407.2@612.2,3242.13 612.2,3301.18 773.62,3462.6 837.6,3462.6 901.58,3526.57 U25.8@901.58,3577.76 ; U25.7@872.05,3650.59 900.59,3622.05 U25.8@900.59,3589.57
NetU25_10: C659.2 R1389.2 U25.10 | length 139.5
  Top Layer w6: U25.10@939.96,3396.65 931.1,3387.79 R1389.2@931.1,3302.16 C659.2@972.44,3302.16
NetU25_12: C660.2 R1412.2 U25.12 | length 908.9
  Top Layer w6: v1(1002.95,3301.18) C660.2@1027.56,3301.18 ; C660.2@1025.59,3300.2 1027.56,3302.17 R1412.2@1063.98,3302.17
  Bottom Layer w6: U25.12@489.17,3401.57 489.17,3399.61 456.69,3367.13 456.69,3206.69 486.22,3177.17 924.21,3177.17 1003.94,3256.89 v1@1003.94,3301.18
NetU26_2: C386A.1 L31.1 U26.2 | length 98.5
  Top Layer w14: C386A.1@452.76,1031.5 456.69,1027.56 548.23,1027.56 549.21,1028.54
NetU26_4: R1414.1 R1415.1 U26.4 | length 121.5
  Top Layer w14: U26.4@587.6,1088.58 587.6,1159.45 588.58,1158.46 R1414.1@637.8,1158.46
NetU26_6: C386A.2 U26.6 | length 58.5
  Top Layer w14: C386A.2@452.76,1087.6 509.84,1087.6 U26.6@510.83,1088.58
NetU27_2: C393.2 L32.2 U27.2 | length 106.9
  Top Layer w14: 3573.82,2769.68 3675.2,2769.68 C393.2@3679.13,2765.75
NetU27_4: R1417.2 R1418.1 U27.4 | length 285.7
  Top Layer w14: R1417.2@3277.56,2678.15 3278.54,2679.13 3327.76,2679.13 3357.28,2708.66 3549.21,2708.66 U27.4@3550.2,2709.65
NetU27_5: C395.2 R2604.1 U27.5 | length 163.8
  Top Layer w6: v1(3584.65,2653.54) U27.5@3584.65,2707.68
  Bottom Layer w6: R2604.1@3585.63,2761.81 C395.2@3585.63,2699.8 3585.63,2653.54 v1@3586.61,2652.56
NetU27_6: C393.1 U27.6 | length 56.3
  Top Layer w14: U27.6@3624.02,2706.69 3626.97,2709.65 C393.1@3679.13,2709.65
NetU28_2: C400.1 L33.1 U28.2 | length 93.4
  Top Layer w14: C400.1@241.14,1611.22 244.09,1608.27 327.76,1608.27 331.69,1604.33
NetU28_4: R1420.1 R1421.1 U28.4 | length 150.9
  Top Layer w14: U28.4@375.98,1670.28 375.98,1723.42 400.59,1748.03 R1420.1@463.58,1748.03
NetU28_6: C400.2 U28.6 | length 53.6
  Top Layer w14: C400.2@240.16,1668.31 292.32,1668.31 U28.6@293.31,1669.29
NetU30_2: R1481.1 U30.2 | length 50.6
  Bottom Layer w6: R1481.1@1415.35,696.85 1464.57,696.85 U30.2@1465.55,697.83
NetU30_3: R1482.1 R1483.1 U30.3 | length 158.9
  Bottom Layer w20: U30.3@1516.73,786.42 R1483.1@1615.16,786.42 1674.21,786.42 R1482.1@1675.2,787.4
NetU31_A16: R2436.1 U31.A16 | length 136
  Top Layer w6: U31.A16@2144.69,1328.53 2221.25,1328.53 2238.19,1345.47 R2436.1@2273.62,1345.47
NetU31_A19: R2608.1 U31.A19 | length 152.1
  Top Layer w6: U31.A19@2144.69,1234.2 2224.36,1154.53 R2608.1@2263.78,1154.53
NetU31_B12: R2447.1 U31.B12 | length 195.8
  Top Layer w6: U31.B12@2113.03,1454.31 2129.2,1470.47 2161.42,1470.47 2196.85,1505.91 2243.11,1505.91 2248.03,1510.83 R2447.1@2285.43,1510.83
NetU31_B13: R2543.1 U31.B13 | length 293
  Top Layer w6: U31.B13@2113.03,1422.87 2129.59,1406.31 2179.94,1406.31 2216.54,1442.91 2333.66,1442.91 2355.32,1464.57 R2543.1@2375,1464.57
NetU31_B14: R2446.1 U31.B14 | length 285.8
  Top Layer w6: U31.B14@2113.03,1391.42 2128.47,1375.98 2182.09,1375.98 2222.44,1416.34 2346.46,1416.34 2355.32,1425.2 R2446.1@2372.05,1425.2
NetU31_B18: R2609.1 U31.B18 | length 194
  Top Layer w6: U31.B18@2113.03,1265.65 2113.09,1265.65 2128.94,1281.5 2172.24,1281.5 2208.66,1245.08 2251.97,1245.08 R2609.1@2275.59,1221.46
NetU31_C12: R2445.1 U31.C12 | length 298.9
  Top Layer w6: U31.C12@2081.38,1454.31 2096.72,1438.98 ; 2172.24,1438.98 2096.72,1438.98 ; R2445.1@2282.48,1461.61 R2445.1@2285.43,1464.57 ; R2445.1@2284.19,1463.32 2276.2,1455.34 2203.18,1455.34 2186.82,1438.98 2096.72,1438.98
NetU31_C13: R2442.2 U31.C13 | length 280.3
  Top Layer w6: U31.C13@2081.38,1422.87 2095.47,1408.78 v1@2095.47,1408.46
  Bottom Layer w6: v1@2097.44,1404.53 2121.06,1404.53 2135.83,1389.76 2213.58,1389.76 2266.89,1443.07 2266.89,1467.68 2282.48,1483.27 R2442.2@2298.23,1483.27
  other v1: 2097.44,1407.48
NetU31_C15: R2434.2 U31.C15 | length 417.9
  Top Layer w6: v1(2065.95,1375) 2066.36,1375 U31.C15@2081.38,1359.98
  Bottom Layer w6: v1@2065.95,1372.05 v1(2065.95,1375) 2083.41,1357.54 2107.54,1357.54 2117.13,1367.13 2174.84,1367.13 ; 2174.84,1366.95 2239.42,1366.95 2277.73,1405.27 2277.73,1452.76 2288.43,1463.46 2343.84,1463.46 2363.65,1483.27 R2434.2@2372.05,1483.27
NetU31_C16: R2441.2 U31.C16 | length 318.9
  Top Layer w6: v1(2066.93,1342.52) 2080.92,1328.53 U31.C16@2081.38,1328.53
  Bottom Layer w6: v1(2066.93,1342.52) 2066.93,1339.57 2080.96,1325.54 2215.3,1325.54 2297.24,1407.48 R2441.2@2297.24,1433.07
NetU31_C18: R2444.1 U31.C18 | length 220.8
  Top Layer w6: U31.C18@2081.38,1265.65 2097.03,1250 2158.46,1250 2173.39,1235.08 2226.54,1235.08 2269.69,1191.93 R2444.1@2269.69,1189.96
NetU31_D16: R2445B.1 U31.D16 | length 233.1
  Top Layer w6: U31.D16@2049.73,1328.53 2065.27,1312.99 2273.62,1312.99 R2445B.1@2275.59,1311.02
NetU31_E13: R2443.2 U31.E13 | length 480.8
  Top Layer w6: U31.E13@2018.08,1422.87 2018.08,1421.88 v1(2033.46,1406.5)
  Bottom Layer w6: v1@2034.45,1405.51 2050.2,1389.76 2050.2,1332.68 2067.34,1315.54 2225.97,1315.54 2328.74,1418.31 2351.38,1418.31 R2443.2@2371.06,1437.99
NetU31_E16: R2435.2 U31.E16 | length 325
  Top Layer w6: v1(2002.95,1313.98) 2017.51,1328.53 U31.E16@2018.08,1328.53
  Bottom Layer w6: v1@2001.97,1315.94 2002.95,1315.94 2072.68,1246.22 2259.02,1246.22 R2435.2@2271.65,1258.86
NetU31_F12: R2539.2 U31.F12 | length 63.5
  Top Layer w6: U31.F12@1986.43,1454.31 2002.75,1437.99 v1(2002.95,1437.99)
  Bottom Layer w6: R2539.2@1965.55,1442.91 1996.06,1442.91 v1@2002.95,1436.02
NetU31_F15: R2437.2 U31.F15 | length 387.3
  Top Layer w6: U31.F15@1986.43,1359.98 1986.48,1359.98 v1(2001.97,1344.49)
  Bottom Layer w6: v1@2000.98,1340.55 1985.24,1324.8 1985.24,1302.16 1998.86,1288.54 2015.59,1288.54 2067.91,1236.22 2258.86,1236.22 R2437.2@2272.64,1222.44
NetU31_G5: R2457.2 U31.G5 | length 214.3
  Top Layer w6: U31.G5@1954.78,1674.42 1954.93,1674.42 v1(1970.47,1689.96)
  Bottom Layer w6: v1(1970.47,1689.96) 1970.47,1687.99 1987.2,1671.26 2076.53,1671.26 2078.8,1673.53 2108.57,1673.53 2132.87,1697.83 R2457.2@2132.87,1707.68
NetU31_G8: C2349.2 C2350.2 FB10.1 U31.G8 | length 713.3
  Top Layer w14: U31.G8@1954.78,1580.09 1970.89,1563.98 v1(1971.46,1563.98)
  Bottom Layer w12: C2349.2@1429.13,1413.39 1465.55,1449.8 1560.04,1449.8 1567.91,1457.68 1606.3,1457.68 1617.13,1446.85 1637.51,1446.85 1647.35,1456.69 1663.39,1456.69 1672.24,1447.83 1700.49,1447.83 1714.27,1461.61 1725.39,1461.61 1753.94,1490.16 1832.68,1490.16 1855.32,1512.79 1922.24,1512.79 1941.93,1532.48 1941.93,1534.45 v1(1971.46,1563.98)
  Bottom Layer w14: FB10.1@1353.35,1406.5 1418.31,1406.5 C2349.2@1420.28,1408.46
NetU31_H5: R2456.1 U31.H5 | length 61
  Top Layer w6: U31.H5@1923.13,1674.42 1923.13,1675.09 v1(1937.99,1689.96)
  Bottom Layer w12: R2456.1@1914.37,1657.48 1914.37,1663.39 v1@1937.99,1687.01
NetU31_H6: C2303.1 C2304.2 R2458.1 R2459.2 U31.H6 | length 410.1
  Top Layer w14: U31.H6@1923.13,1642.98 1937.99,1657.84 v1@1937.99,1658.46
  Bottom Layer w14: v1@1939.96,1656.5 2082.27,1656.5 2084.81,1659.03 2110.07,1659.03 2112.61,1656.5 2136.81,1656.5 2157.48,1677.17 2232.28,1677.17 2291.34,1736.22 C2304.2@2293.31,1736.22
  other v1: 1939.96,1658.46
NetU31_N6: R1494.1 R1499.2 U31.N6 | length 547.2
  Top Layer w14: U31.N6@1764.87,1642.98 1780.51,1627.33 1780.51,1626.97 1775.07,1632.41
  Bottom Layer w12: R1494.1@1314.96,1522.64 R1499.2@1350.39,1522.64 1352.36,1520.67 1352.36,1522.64 1377.95,1548.23 1481.3,1548.23 1493.11,1536.42 1666.34,1536.42 1755.91,1625.98 v1@1776.58,1625.98
  other v1: 1780.51,1625
NetU31_P6: C1985.1 C1987.2 R2159.1 R2161.2 U31.P6 | length 315.1
  Top Layer w14: v1(1719.49,1657.48) 1719.49,1656.7 U31.P6@1733.22,1642.98
  Bottom Layer w12: C1987.2@1459.65,1742.13 1479.33,1742.13 1554.13,1667.32 1709.65,1667.32 v1(1719.49,1657.48)
NetU31_R6: R1495.1 R1497.2 U31.R6 | length 424.8
  Top Layer w14: v1@1687.01,1628.94 1701.05,1642.98 U31.R6@1701.57,1642.98
  Bottom Layer w10: R1495.1@1314.96,1571.85 R1497.2@1350.39,1571.85 1375.98,1597.44 1560.04,1597.44 1571.85,1585.63 1648.62,1585.63 1687.01,1624.02 v1@1687.01,1625
  other v1: 1687.99,1628.94
NetU31_T6: R1496.1 R1498.2 U31.T6 | length 402.6
  Top Layer w14: v1(1656.5,1627.95) 1669.91,1641.37 U31.T6@1669.91,1642.98
  Bottom Layer w10: R1496.1@1314.96,1622.05 1350.39,1622.05 1375.98,1647.64 1471.46,1647.64 1503.94,1615.16 1572.83,1615.16 1585.63,1602.36 1632.87,1602.36 v1@1657.48,1626.97
NetU31_V18: R2465.2 U31.V18 | length 352.2
  Top Layer w6: R2465.2@1279.53,1269.68 1294.29,1269.68 1313.98,1250 1377.95,1250 1391.22,1236.73 1497.56,1236.73 1510.83,1250 1594.49,1250 U31.V18@1607.28,1262.8
NetU65_7: R1401.2 R1950.2 R2392.2 U65.7 | length 174.9
  Top Layer w6: v1(452.76,2047.24) U65.7@512.8,2047.24
  Bottom Layer w6: v1@453.74,2050.2 456.69,2047.24 R1401.2@492.13,2047.24 492.13,1973.42 R1950.2@493.11,1972.44
NetU69_1: R2551.2 U69.1 | length 148.1
  Bottom Layer w14: R2551.2@3581.69,3375 3581.69,3325.79 3611.22,3296.26 U69.1@3668.31,3296.26
NetU70_1: R3555.2 U70.1 | length 189.8
  Bottom Layer w14: R3555.2@3012.8,3366.14 3012.8,3336.61 3055.12,3294.29 U70.1@3155.51,3294.29
NetU72_6: C2400.2 U72.6 | length 73.7
  Top Layer w8: C2400.2@1072.83,2885.83 1091.54,2867.13 U72.6@1138.78,2867.13
NetU72_7: R2617.2 U72.7 | length 65.9
  Top Layer w8: R2617.2@1072.83,2847.44 U72.7@1138.78,2847.44
NetU72_9: R2619.2 U72.9 | length 65
  Top Layer w8: R2619.2@1073.82,2808.07 U72.9@1138.78,2808.07
NetX3_5: R122.1 X3.5 | length 191.9
  Top Layer w6: X3.5@2391.73,1250.98 2450.79,1250.98 2516.73,1185.04 v1(2516.73,1170.28)
  Bottom Layer w6: v1@2513.78,1169.29 2516.73,1172.24 R122.1@2516.73,1192.91
NetX3_6: R120.1 X3.6 | length 89.5
  Top Layer w6: X3.6@2391.73,1200.79 2445.87,1200.79 v1(2450.79,1195.87)
  Bottom Layer w6: v1@2449.8,1193.9 2451.77,1191.93 R120.1@2477.36,1191.93
NetX3_7: C71.2 X3.7 | length 92.2
  Top Layer w6: v1(2335.63,1149.61) 2336.61,1150.59 X3.7@2391.73,1150.59
  Bottom Layer w6: v1@2336.61,1150.59 2339.57,1147.64 C71.2@2371.06,1147.64
NetX5_1: R277.2 X5.1 | length 70.1
  Top Layer w6: R277.2@1192.91,1043.31 1207.68,1058.07 X5.1@1256.89,1058.07
NetX5_2: C362.2 C364.2 L29.1 X5.2 | length 174.8
  Top Layer w14: v1(1120.08,1119.09) 1192.91,1119.09 1195.87,1122.05 X5.2@1256.89,1122.05
  Bottom Layer w14: v1@1121.06,1116.14 1125.98,1111.22 1151.58,1111.22 L29.1@1154.53,1114.17
NetX8_4: C2285.2 C2287.2 L113.2 X8.4 | length 83.1
  Top Layer w12: X8.4@3062.99,2187.01 3144.69,2187.01 v1(3145.67,2186.02)
NetY2_7: X3.2 Y2.2 Y2.7 | length 518.8
  Top Layer w6: Y2.2@2579.72,787.4 2577.76,789.37 2577.76,829.72 2586.61,838.58 2617.13,838.58 Y2.7@2638.78,816.93 ; X3.2@2611.22,1150.59 2663.39,1150.59 2673.23,1140.75 2673.23,849.41 Y2.7@2641.73,817.91
PS-DDR-A0_0: R2517.1 U31.N2 | length 395.6
  Top Layer w6: v1(1620.08,1864.17) 1621.06,1865.16 1735.24,1865.16 1751,1852 1751,1784 U31.N2@1764.87,1768.75
  Bottom Layer w6: R2517.1@1524.61,1998.03 1524.61,1978.35 1621.06,1881.89 v1@1621.06,1867.13
PS-DDR-A1_0: R2518.1 U31.K2 | length 329.9
  Top Layer w6: U31.K2@1859.82,1768.75 1875.98,1784.91 1875.98,1963.58 v1(1861.22,1978.35)
  Bottom Layer w6: R2518.1@1858.27,2084.65 1861.22,2081.69 v1(1861.22,1978.35)
PS-DDR-A2_0: R2519.1 U31.M3 | length 389.2
  Top Layer w6: v1(1781.5,1751.97) 1796.16,1737.31 U31.M3@1796.52,1737.31
  Bottom Layer w6: R2519.1@1701.77,2087.6 1701.77,1957.68 1765.75,1893.7 1765.75,1798.23 1782.48,1781.5 v1@1782.48,1752.95
PS-DDR-A3_0: R2520.1 U31.K3 | length 285.3
  Top Layer w6: v1(1801.18,1967.52) 1805.12,1963.58 1805.12,1909.45 1845,1871 1845,1754 U31.K3@1859.82,1737.31
  Bottom Layer w6: v1(1801.18,1967.52) 1801.18,1997.05 R2520.1@1802.17,1998.03
PS-DDR-A4_0: R2521.1 U31.M4 | length 370.7
  Top Layer w6: v1@1780.51,1688.98 1780.51,1689.86 v1(1781.17,1690.51) U31.M4@1796.52,1705.86
  Bottom Layer w6: R2521.1@1681.1,1994.09 1681.1,1957.68 1750.98,1887.79 1750.98,1783.46 1765.02,1769.43 1765.02,1756.98 ; 1765.01,1756.97 1765.01,1706.67 v1(1781.17,1690.51) v1@1778.97,1690.51
PS-DDR-A5_0: R2522.1 U31.L1 | length 225.7
  Top Layer w6: v1(1821.85,1863.19) 1828.17,1856.87 U31.L1@1828.17,1800.2
  Bottom Layer w6: R2522.1@1760.83,1998.03 1760.83,1958.66 1821.85,1897.64 v1(1821.85,1863.19)
PS-DDR-A6_0: R2523.1 U31.L4 | length 432.9
  Top Layer w6: v1@1812.99,1720.47 1827.6,1705.86 U31.L4@1828.17,1705.86
  Bottom Layer w6: R2523.1@1740.16,2085.63 1741.14,2084.65 1741.14,1957.68 1797.24,1901.57 1797.24,1858.27 1832.68,1822.83 1832.68,1740.16 v1@1812.99,1720.47
  other v1: 1813.98,1718.5
PS-DDR-A7_0: R2524.1 U31.K4 | length 417.8
  Top Layer w6: v1(1843.5,1720.47) 1845.21,1720.47 U31.K4@1859.82,1705.86
  Bottom Layer w6: R2524.1@1781.5,2087.6 1779.53,2085.63 1779.53,2045.3 1779.64,2045.19 1779.64,2029.61 1779.53,2029.5 1779.53,2005.93 1779.64,2005.82 1779.64,1990.24 1779.53,1990.13 1779.53,1960.63 1844.49,1895.67 1844.49,1721.46 v1(1843.5,1720.47)
PS-DDR-A8_0: R2525.1 U31.K1 | length 272
  Top Layer w6: v1(1840.55,1958.66) 1851.38,1958.66 1859.25,1950.79 1859.25,1937.01 1851.38,1929.13 1825.79,1929.13 1819.88,1923.23 1819.88,1916.34 1826.77,1909.45 1855.32,1909.45 1859.82,1904.94 U31.K1@1859.82,1800.2
  Bottom Layer w6: v1(1840.55,1958.66) 1840.55,1992.13 R2525.1@1841.54,1993.11
PS-DDR-A9_0: R2526.1 U31.J4 | length 314.4
  Top Layer w6: v1@1876.97,1719.49 1890.59,1705.86 U31.J4@1891.47,1705.86
  Bottom Layer w6: v1@1875,1718.5 1891.73,1735.24 1891.73,1761.81 1876.97,1776.57 1876.97,1942.91 1880.91,1946.85 R2526.1@1880.91,1998.03
  other v1: 1875.98,1720.47
PS-DDR-A10_0: R2527.1 U31.F5 | length 360.6
  Top Layer w6: U31.F5@1986.43,1674.42 2000.98,1688.98 v1(2001.97,1688.98)
  Bottom Layer w6: R2527.1@1961.61,1998.03 1961.61,1988.19 2016.73,1933.07 2016.73,1702.76 v1@2001.97,1687.99
PS-DDR-A11_0: R2528.1 U31.G4 | length 334.2
  Top Layer w6: v1(1938.98,1720.47) 1953.58,1705.86 U31.G4@1954.78,1705.86
  Bottom Layer w6: R2528.1@1921.26,1998.03 1921.26,1963.58 1931.1,1953.74 1931.1,1918.31 1971.46,1877.95 1971.46,1782.48 1954.72,1765.75 1954.72,1735.24 1939.96,1720.47 v1(1938.98,1720.47)
PS-DDR-A12_0: R2529.1 U31.E4 | length 406.6
  Top Layer w6: U31.E4@2018.08,1705.86 2018.86,1705.86 v1(2033.46,1720.47)
  Bottom Layer w6: R2529.1@1980.32,2083.66 1981.3,2082.68 1981.3,1989.17 2033.46,1937.01 v1(2033.46,1720.47)
PS-DDR-A13_0: R2530.1 U31.D4 | length 326.3
  Top Layer w6: U31.D4@2049.73,1705.86 2050.35,1705.86 v1(2064.96,1720.47)
  Bottom Layer w6: R2530.1@2000.98,1999.02 2047.24,1952.76 2047.24,1738.19 v1(2064.96,1720.47)
PS-DDR-A14_0: R2531.1 U31.F4 | length 493.2
  Top Layer w6: v1(1971.46,1720.47) 1971.82,1720.47 U31.F4@1986.43,1705.86
  Bottom Layer w6: R2531.1@1940.95,2087.6 1940.95,1985.24 1958.66,1967.52 1958.66,1956.69 1946.85,1944.88 1946.85,1923.23 1952.76,1917.32 1958.66,1917.32 1960.63,1919.29 1960.63,1933.07 1970.47,1942.91 1982.28,1942.91 2000.98,1924.21 2000.98,1751.97 v1@1972.44,1723.42
PS-DDR-BA0_0: R2514.1 U31.L5 | length 437.7
  Top Layer w6: U31.L5@1828.17,1674.42 1828.95,1674.42 v1(1844.49,1689.96)
  Bottom Layer w6: R2514.1@1820.87,2082.68 1820.87,1946.85 1859.5,1908.21 1859.5,1704.98 v1(1844.49,1689.96)
PS-DDR-BA1_0: R2515.1 U31.R4 | length 444.9
  Top Layer w6: U31.R4@1701.57,1705.86 1688,1721 1688,1810 1705.71,1829.72 v1(1710.63,1829.72)
  Bottom Layer w6: R2515.1@1599.41,2086.61 1601.38,2086.61 1620.08,2067.91 1620.08,1973.42 1710.63,1882.87 v1(1710.63,1829.72)
PS-DDR-BA2_0: R2516.1 U31.J5 | length 446
  Top Layer w6: U31.J5@1891.47,1674.42 1892.92,1674.42 v1(1907.48,1688.98)
  Bottom Layer w6: R2516.1@1900.59,2088.58 1900.59,1964.57 1913.39,1951.77 1913.39,1906.5 1920.28,1899.61 1920.28,1862.2 1913.39,1855.31 1913.39,1826.77 1923.23,1816.93 1923.23,1704.72 v1@1905.51,1687.01
PS-DDR-CAS_0: R2533.1 U31.P5 | length 485.9
  Top Layer w6: v1(1719.49,1688.98) 1719.49,1688.15 U31.P5@1733.22,1674.42
  Bottom Layer w6: R2533.1@1559.06,2087.6 1559.06,2068.9 1579.72,2048.23 1579.72,1964.57 1676.18,1868.11 1676.18,1786.42 1686.02,1776.57 1686.02,1721.46 1718.5,1688.98 v1@1718.5,1687.99
PS-DDR-CKE_0: R2536.1 U31.N3 | length 338
  Top Layer w6: v1@1750,1722.44 U31.N3@1764.87,1737.31
  Bottom Layer w6: R2536.1@1640.75,1997.05 1640.75,1977.36 1731.3,1886.81 1731.3,1739.17 v1@1746.56,1723.92
  other v1: 1749,1724
PS-DDR-CS_0: R2535.1 U31.N1 | length 392.3
  Top Layer w6: v1(1595.47,1882.87) 1597.44,1884.84 1736.22,1884.84 1764.87,1856.19 U31.N1@1764.87,1800.2
  Bottom Layer w6: R2535.1@1489.17,1998.03 1489.17,1988.19 1590.55,1886.81 v1@1591.54,1886.81
PS-DDR-ODT_0: R2513.1 U31.N5 | length 392.3
  Top Layer w6: v1(1750.98,1687.99) 1751.3,1687.99 U31.N5@1764.87,1674.42
  Bottom Layer w6: R2513.1@1600.39,1997.05 1600.39,1967.52 1690.95,1876.97 1690.95,1794.29 1705.71,1779.53 1705.71,1733.27 v1@1751.97,1687.01
PS-DDR-RAS_0: R2532.1 U31.P4 | length 427.1
  Top Layer w6: v1(1640.75,1844.49) 1645.67,1849.41 1721.46,1849.41 1736.22,1834.65 1736.22,1827.76 1720,1808 1720,1723 U31.P4@1733.22,1705.86
  Bottom Layer w6: R2532.1@1560.04,1996.06 1560.04,1963.58 1641.73,1881.89 v1@1641.73,1845.47
PS-DDR-WE_0: R2534.1 U31.M5 | length 366.1
  Top Layer w6: U31.M5@1796.52,1674.42 1798.44,1674.42 v1(1812.99,1688.98)
  Bottom Layer w6: R2534.1@1721.46,1998.03 1721.46,1957.68 1781.5,1897.64 1781.5,1828.73 1781.24,1828.48 1781.24,1807.34 1798.23,1790.35 1798.23,1757.86 1797.98,1757.61 1797.98,1704.98 v1@1811.02,1691.93
REGOUT: C379.2 C382.1 L30.2 U24.8 | length 211
  Top Layer w10: v1@707.95,2288.65 v1(708.66,2289.37) U24.8@708.66,2218.24
  Bottom Layer w20: L30.2@627.95,2321.85 707.68,2321.85 C379.2@709.65,2323.82 ; C382.1@708.66,2266.73 708.66,2318.9 C379.2@711.61,2321.85